# Altium PCB V2.PcbDoc
Units mm, origin at the board's own origin, x right, y up, seen from the top; angles counter-clockwise.
Board outline 99.95 x 100.08 mm, 2 copper layers (Top Layer, Bottom Layer); 77 components, 58 nets, 333 pads, 20 vias.
Unrouted connection lines stored in the file: 131.
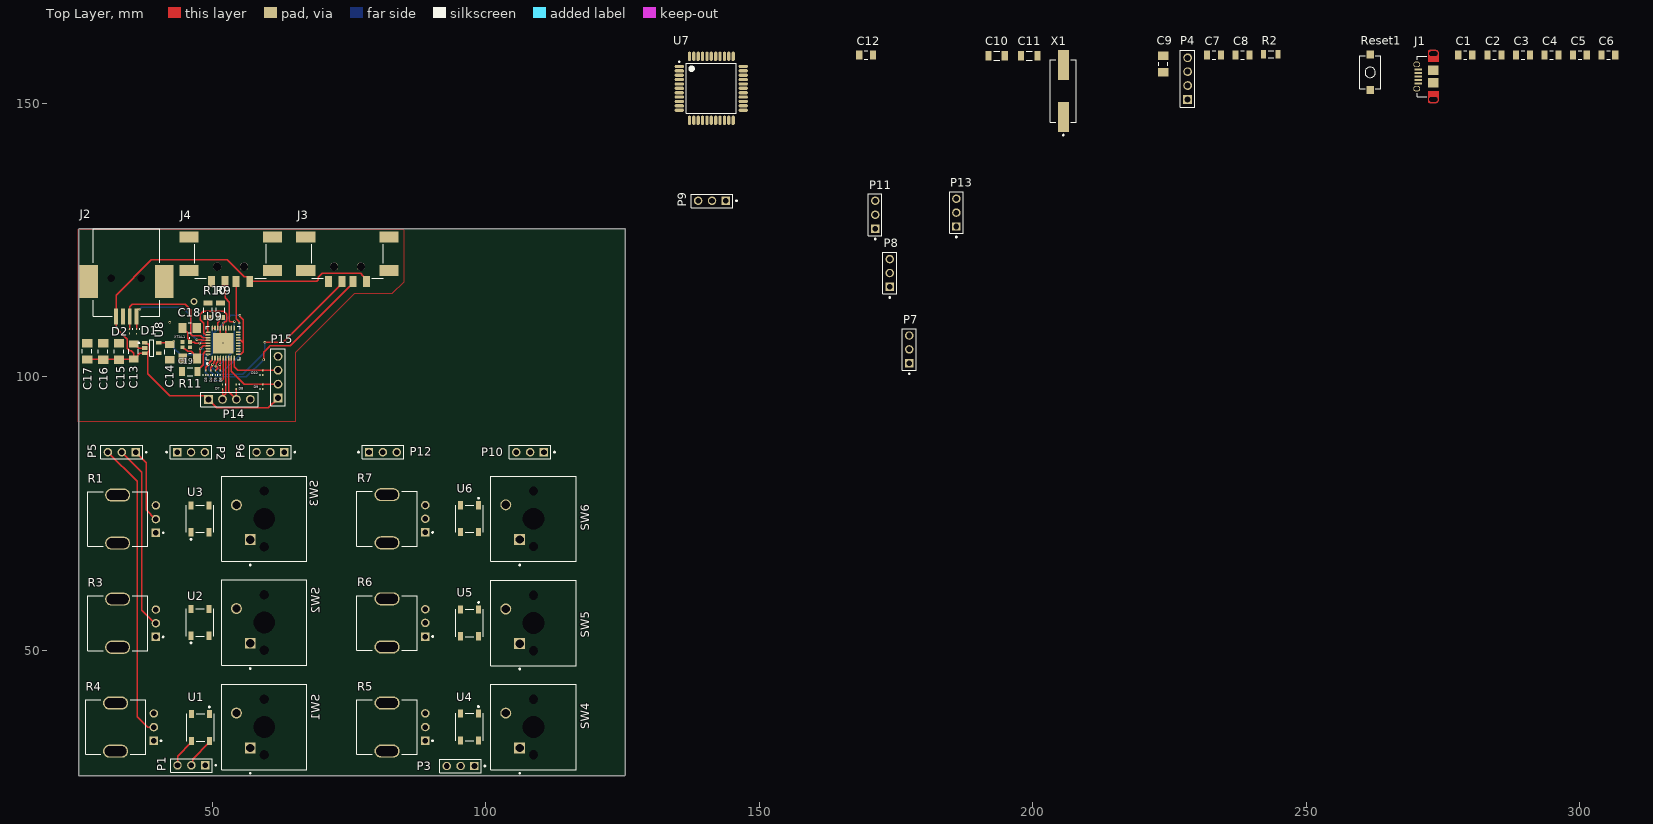
[diagram p0: Top Layer view]
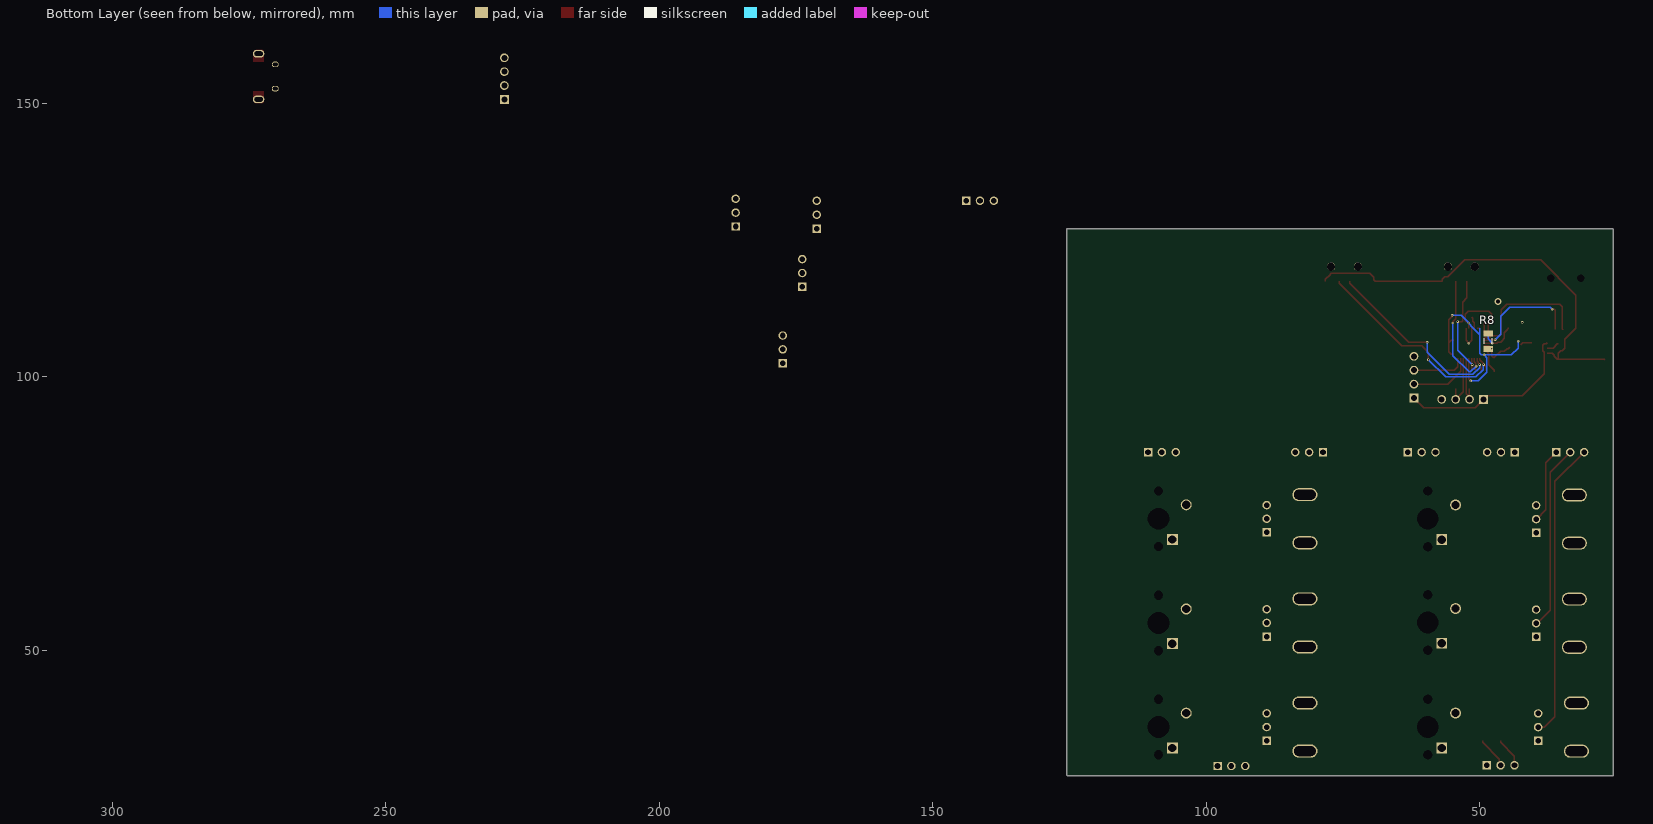
[diagram p1: Bottom Layer view, seen from below]

## Layer stack, top to bottom
Top Solder: solder mask 0.0102, Solder Resist, Dk 3.5
Top Layer: signal copper 0.0356
Dielectric 1: dielectric 0.32, FR-4, Dk 4.8
Bottom Layer: signal copper 0.0356
Bottom Solder: solder mask 0.0102, Solder Resist, Dk 3.5

## Board outline
25.527,27.051 25.527,127 25.654,127.127 125.476,127.127 125.476,27.178 125.349,27.051

## Design rules (kind name [scope] priority, off if disabled: settings)
Clearance [All] p1: gap=0.254 ignorepadtopadclearanceinfootprint=TRUE except(0: Arc-Hole Track-Hole SMDPad-Hole THPad-Hole Via-Hole Fill-Hole Poly-Hole Region-Hole Text-Hole; 0.2: Arc-Arc Arc-Track Arc-SMDPad Track-Track Track-SMDPad SMDPad-SMDPad)
PolygonConnect [All] p1: connectstyle=Relief reliefconductorwidth=0.254 reliefentries=4 polygonreliefangle="90 Angle" airgapwidth=0.254
RoutingVias [All] p1: holewidth=0.2 width=0.45 viastyle="Through Hole" minholewidth=0.2 minwidth=0.45 maxholewidth=0.2 maxwidth=0.45
RoutingVias RoutingVias_1 [All] p2: holewidth=0.711 width=1.27 viastyle="Through Hole" minholewidth=0.2 minwidth=0.45 maxholewidth=0.711 maxwidth=1.27
SolderMaskExpansion [All] p1: expansion=0.102 istentingtop=FALSE
Width [All] p1: maxlimit=0.254 minlimit=0.254 preferedwidth=0.254
30 further rules are at their usual default settings.

## Classes and differential pairs
component class "usb HUB": C13 C14 C15 C16 C17 C18 C19 D1 D2 D3 D4 D5 D6 D7 D8 D9 D10 J2 J3 J4 P14 P15 R8 R9 R10 R11 U8 U9 XTAL1
component class Deej: C1 C2 C3 C4 C5 C6 C7 C8 C9 C10 C11 C12 J1 P4 P5 P6 P7 P8 P9 P10 P11 P12 P13 P14 P15 R1 R2 R3 R4 R5 R6 R7 Reset1 SW1 SW2 SW3 SW4 SW5 SW6 U1 U2 U3 U4 U5 U6 U7 X1

## Components (designator, comment, footprint, x,y, rotation, side; value= is the part's Value field where it differs from the comment)
C1 "GRM31C5C1E104JA01L" CAPC3216X180X55LL20T25 279.141,158.877 r0 top
C2 "GRM31C5C1E104JA01L" CAPC3216X180X55LL20T25 284.475,158.877 r0 top
C3 "GRM31C5C1E104JA01L" CAPC3216X180X55LL20T25 289.682,158.877 r0 top
C4 "GRM31C5C1E104JA01L" CAPC3216X180X55LL20T25 294.889,158.877 r0 top
C5 "GRM31C5C1E104JA01L" CAPC3216X180X55LL20T25 300.096,158.877 r0 top
C6 "GRM31C5C1E104JA01L" CAPC3216X180X55LL20T25 305.303,158.877 r0 top
C7 "GRM31C5C1E104JA01L" CAPC3216X180X55LL20T25 233.167,158.877 r0 top
C8 "GRM31C5C1E104JA01L" CAPC3216X180X55LL20T25 238.374,158.877 r0 top
C9 "C1206C105K3RACTU" CAPC3216X180X50ML20T25 223.896,157.226 r90 top
C10 "CAP 22pF 50V 1206(3216)" CAPC1206(3216)100_N 193.416,158.75 r0 top value=22nF
C11 "CAP 22 pF 50V 1206(3216)" CAPC1206(3216)100_N 199.385,158.75 r0 top value=22nF
C12 "GRM31C5C1E104JA01L" CAPC3216X180X55LL20T25 169.54,158.877 r0 top
C13 "CL31B105MAHNNNE" FP-CL31-IPC_B 35.56,104.648 r90 top
C14 "CL31B105MAHNNNE" FP-CL31-IPC_B 42.164,104.521 r270 top
C15 "12061Z475KAT2A" CAPC3216X190X50ML20T25 32.893,104.648 r90 top
C16 "12061Z475KAT2A" CAPC3216X190X50ML20T25 29.972,104.648 r90 top
C17 "12061Z475KAT2A" CAPC3216X190X50ML20T25 27.051,104.672 r90 top
C18 "GRM31A7U2J180JW31D" FP-GRM31A-0_2-e0_3_0_95-IPC_B 45.816,108.966 r0 top
C19 "GRM31A7U2J180JW31D" FP-GRM31A-0_2-e0_3_0_95-IPC_B 45.847,103.378 r180 top
D1 "ESD9B3.3ST5G" ONSC-SOD-923-2-514AB-01_V 36.098,108.313 r270 top
D2 "ESD9B3.3ST5G" ONSC-SOD-923-2-514AB-01_V 34.798,108.331 r270 top
D3 "ESD9B3.3ST5G" ONSC-SOD-923-2-514AB-01_V 48.768,100.75 r90 top
D4 "ESD9B3.3ST5G" ONSC-SOD-923-2-514AB-01_V 49.657,100.75 r90 top
D5 "ESD9B3.3ST5G" ONSC-SOD-923-2-514AB-01_V 50.546,100.75 r90 top
D6 "ESD9B3.3ST5G" ONSC-SOD-923-2-514AB-01_V 51.435,100.75 r90 top
D7 "ESD9B3.3ST5G" ONSC-SOD-923-2-514AB-01_V 51.816,98.21 r270 top
D8 "ESD9B3.3ST5G" ONSC-SOD-923-2-514AB-01_V 54.356,98.21 r270 top
D9 "ESD9B3.3ST5G" ONSC-SOD-923-2-514AB-01_V 59.182,98.171 r90 top
D10 "ESD9B3.3ST5G" ONSC-SOD-923-2-514AB-01_V 59.182,100.75 r90 top
J1 "629105150921" 629105150921 273.299,154.94 r90 top
J2 "1734346-1" TECO-1734346-1_V 34.228,111.055 r90 top locked
J3 "629104190121" 629104190121 74.676,123.063 r180 top locked
J4 "629104190121" 629104190121 53.303,123.063 r180 top locked
P1 "22-28-4033" MOLX-22-28-4033_V 46.126,28.956 r180 top
P2 "22-28-4033" MOLX-22-28-4033_V 46.058,86.233 r0 top
P3 "22-28-4033" MOLX-22-28-4033_V 95.363,28.829 r180 top
P4 "61300411121" 61300411121 228.341,154.559 r90 top
P5 "22-28-4033" MOLX-22-28-4033_V 33.401,86.233 r180 top
P6 "22-28-4033" MOLX-22-28-4033_V 60.579,86.233 r180 top
P7 "22-28-4033" MOLX-22-28-4033_V 177.419,105.029 r90 top
P8 "22-28-4033" MOLX-22-28-4033_V 173.863,118.999 r90 top
P9 "22-28-4033" MOLX-22-28-4033_V 141.351,132.207 r180 top
P10 "22-28-4033" MOLX-22-28-4033_V 108.077,86.233 r180 top
P11 "22-28-4033" MOLX-22-28-4033_V 171.196,129.667 r90 top
P12 "22-28-4033" MOLX-22-28-4033_V 81.153,86.233 r0 top
P13 "22-28-4033" MOLX-22-28-4033_V 186.055,130.048 r90 top
P14 "61300411121" 61300411121 53.086,95.885 r0 top
P15 "61300411121" 61300411121 61.976,99.949 r90 top
R1 "PTV09A-4020U-B103" FP-PTV09A-4-MFG 32.639,73.991 r90 top value=10kΩ
R2 "ERJ-P08J103V" RESC3216X70X50LL05T20 243.581,159.004 r0 top
R3 "PTV09A-4020U-B103" FP-PTV09A-4-MFG 32.639,54.951 r90 top value=10kΩ
R4 "PTV09A-4020U-B103" FP-PTV09A-4-MFG 32.258,35.941 r90 top value=10kΩ
R5 "PTV09A-4020U-B103" FP-PTV09A-4-MFG 81.915,35.96 r90 top value=10kΩ
R6 "PTV09A-4020U-B103" FP-PTV09A-4-MFG 81.915,55.01 r90 top value=10kΩ
R7 "PTV09A-4020U-B103" FP-PTV09A-4-MFG 81.915,74.06 r90 top value=10kΩ
R8 "ERJ-8ENF1004V" RESC3216X70X50NL05T20 48.387,106.553 r270 bottom
R9 "CRCW120656K0FKEA" FP-CRCW1206-e3-IPC_C 51.435,112.212 r270 top
R10 "CRCW120656K0FKEA" FP-CRCW1206-e3-IPC_C 49.149,112.212 r270 top
R11 "ERJ-8GEYJ123V" RESC3216X70X50NL05T20 45.847,100.965 r180 top
Reset1 "434121025816" 434121025816 261.742,155.702 r90 top
SW1 "MX1A-11NW" CHRY-MX1A-11NW_V 59.436,35.96 r90 top
SW2 "MX1A-11NW" CHRY-MX1A-11NW_V 59.436,55.088 r90 top
SW3 "MX1A-11NW" CHRY-MX1A-11NW_V 59.436,74.041 r90 top
SW4 "MX1A-11NW" CHRY-MX1A-11NW_V 108.712,35.96 r90 top
SW5 "MX1A-11NW" CHRY-MX1A-11NW_V 108.712,55.01 r90 top
SW6 "MX1A-11NW" CHRY-MX1A-11NW_V 108.712,74.06 r90 top
U1 "WS2812B" ADAI-WS2812B_V 47.776,35.881 r270 top
U2 "WS2812B" ADAI-WS2812B_V 47.708,55.088 r90 top
U3 "WS2812B" ADAI-WS2812B_V 47.708,74.041 r90 top
U4 "WS2812B" ADAI-WS2812B_V 96.984,35.96 r270 top
U5 "WS2812B" ADAI-WS2812B_V 97.013,55.01 r270 top
U6 "WS2812B" ADAI-WS2812B_V 97.013,74.06 r270 top
U7 "ATMEGA32U4-AU" ATML-44ML_M 141.219,152.781 r0 top
U8 "MIC5504-3.3YM5-TR" FP-SOT23-5LD-PL-1-MFG 38.862,105.283 r0 top
U9 "USB2514B-AEZC" MCHP-QFN-36_V 51.943,106.172 r90 top
X1 "9C-3.6864MBBK-T" TXC-9C-2_V 205.608,152.273 r90 top
XTAL1 "XRCGB24M000F0L00R0" XTAL_XRCGB24M000F0L00R0 45.172,105.91 r270 top

## Footprints (in the part's own frame and the unit in brackets; to place one, negate y for a bottom-side part, rotate by r counter-clockwise, add the part's x,y. Pads: shape width x height; smd on the part's side, far side on the other; paste and mask are expansions set on the pad)
61300411121 [mm] "Pin Header, pitch 2.54 mm, THT, Vertical, single row, 4p"
  rect 1.6x1.6 hole 1.1: 1(-3.81,0)
  round 1.6 hole 1.1: 2(-1.27,0) 3(1.27,0) 4(3.81,0)
  silkscreen extent -5.23,-1.35 5.23,1.35, body extent -5.08,-1.27 5.08,1.27, height 8.57
434121025816 [mm] "6.0*3.8mm vertical type, SMD, height 2.5mm, black actuator, 160gf, T&R"
  rect 1.5x1.4 smd: 1(-3.25,0) 2(3.25,0)
  silkscreen extent -3,-1.9 3,1.9, body extent -3.65,-1.95 3.65,1.95, height 2.5
629104190121 [mm] "USB 2.0 Type A Horizontal SMT Short Type"
  rect 1.25x2 smd: 1(-3.5,5.6) 2(-1,5.6) 3(1,5.6) 4(3.5,5.6)
  round 1.5 hole 1.5 unplated: MH1(-2.45,2.9) MH2(2.45,2.9)
  rect 3.5x2 smd: Shell(-7.625,-2.5) Shell(-7.625,3.6) Shell(7.625,-2.5) Shell(7.625,3.6)
  silkscreen extent -6.55,-1.2 6.55,5, body extent -8.25,-5 8.25,6.11, height 6.35
629105150921 [mm] "Micro USB 2.0 Type AB Horizontal"
  rect 0.4x1.35 smd: 1(-1.3,2.805) 2(-0.65,2.805) 3(0,2.805) 4(0.65,2.805) 5(1.3,2.805)
  round 0 / inner oval 1.4x2.1 / far side oval 1.4x2.1 hole 0.825 slot 1.5 at 90 deg mask+0.102: Shell(-4.175,0)
  oval 1.05x1.25 hole 0.65 slot 0.85 at 90 deg: Shell(-2.225,3.055) Shell(2.225,3.055)
  rect 1.8x1.9 smd: Shell(-1.15,0) Shell(1.15,0)
  round 0 / inner round 0 / far side oval 1.4x2.1 hole 0.825 slot 1.5 at 90 deg mask+0.102: Shell(4.175,0)
  Top Layer region: 4.353,-0.95 4.544,-0.912 4.706,-0.804 4.814,-0.641 4.852,-0.45 4.852,-0.45 4.852,0.65 4.83,0.765 4.765,0.862 4.667,0.927 4.553,0.95 4.553,0.95 2.668,0.95 2.668,-0.95
  Top Layer region: -4.353,-0.95 -4.544,-0.912 -4.706,-0.804 -4.814,-0.641 -4.852,-0.45 -4.852,-0.45 -4.852,0.65 -4.83,0.765 -4.765,0.862 -4.667,0.927 -4.553,0.95 -4.553,0.95 -2.668,0.95 -2.668,-0.95
  silkscreen extent -3.7,1.25 3.7,2.97, body extent -4.3,-2.64 4.3,3.23, height 2.76
ADAI-WS2812B_V [mm] "SMD, 4-Leads, Body 5x5mm, Pitch 3.3mm"
  rect 1.5x0.9 smd: 1(-2.45,1.65) 2(-2.45,-1.65) 3(2.45,-1.65) 4(2.45,1.65)
  silkscreen extent -3.87,-2.5 2.5,2.5, body extent -2.7,-2.5 2.7,2.5, height 1.69
ATML-44ML_M [mm] "TQFP, 44-Leads, Body 10x10mm, Pitch 0.8mm, IPC Low Density"
  oval 1.7x0.6 smd: 1(-5.85,4) 2(-5.85,3.2) 3(-5.85,2.4) 4(-5.85,1.6) 5(-5.85,0.8) 6(-5.85,0) 7(-5.85,-0.8) 8(-5.85,-1.6) 9(-5.85,-2.4) 10(-5.85,-3.2) 11(-5.85,-4) 23(5.85,-4) 24(5.85,-3.2) 25(5.85,-2.4) 26(5.85,-1.6) 27(5.85,-0.8) 28(5.85,0) 29(5.85,0.8) 30(5.85,1.6) 31(5.85,2.4) 32(5.85,3.2) 33(5.85,4)
  oval 0.6x1.7 smd: 12(-4,-5.85) 13(-3.2,-5.85) 14(-2.4,-5.85) 15(-1.6,-5.85) 16(-0.8,-5.85) 17(0,-5.85) 18(0.8,-5.85) 19(1.6,-5.85) 20(2.4,-5.85) 21(3.2,-5.85) 22(4,-5.85) 34(4,5.85) 35(3.2,5.85) 36(2.4,5.85) 37(1.6,5.85) 38(0.8,5.85) 39(0,5.85) 40(-0.8,5.85) 41(-1.6,5.85) 42(-2.4,5.85) 43(-3.2,5.85) 44(-4,5.85)
  silkscreen extent -5.97,-4.6 4.6,4.97, body extent -6,-6 6,6, height 1.2
CAPC1206(3216)100_N [mm] "Chip Capacitor, Body 3.2x1.6mm, Height 1mm, IPC Medium Density"
  rect 1.15x1.8 smd: 1(-1.5,0) 2(1.5,0)
  silkscreen extent -0.55,-0.8 0.55,0.8, body extent -1.7,-0.9 1.7,0.9, height 1
CAPC3216X180X50ML20T25 [mm] "Chip Capacitor, 2-Leads, Body 3.40x1.80mm, IPC Low Density"
  rect 1.5x1.9 smd: 1(-1.5,0) 2(1.5,0)
  silkscreen extent -0.35,-0.85 0.35,0.85, body extent -1.7,-0.9 1.7,0.9, height 1.8
CAPC3216X180X55LL20T25 [mm] "Chip Capacitor, 2-Leads, Body 3.4x1.8mm, IPC High Density"
  rect 1.15x1.7 smd: 1(-1.275,0) 2(1.275,0)
  silkscreen extent -0.3,-0.75 0.3,0.75, body extent -1.7,-0.9 1.7,0.9, height 1.8
CAPC3216X190X50ML20T25 [mm] "Chip Capacitor, 2-Leads, Body 3.20x1.60mm, IPC Low Density"
  rect 1.5x1.9 smd: 1(-1.5,0) 2(1.5,0)
  silkscreen extent -0.35,-0.85 0.35,0.85, body extent -1.7,-0.9 1.7,0.9, height 1.9
CHRY-MX1A-11NW_V [mm] "THD, 2-Leads, Body 15.6x15.6mm"
  rect 2x2 hole 1.499 paste+0: 1(-3.81,2.54)
  round 2 hole 1.499 paste+0: 2(2.54,5.08)
  round 0 hole 3.988 unplated paste+0: MH1(0,0)
  round 0 hole 1.702 unplated paste+0: MH2(-5.08,0) MH3(5.08,0)
  silkscreen extent -8.57,-7.8 7.8,7.8, body extent -7.8,-7.8 7.8,7.8, height 15.2
FP-CL31-IPC_B [mm]
  rect 1.305x1.758 smd paste+0 mask+0: 1(-1.376,0) 2(1.376,0)
  silkscreen extent -0.42,-0.88 0.42,0.88, body extent -2.28,-1.13 2.28,1.13, height 0.25
FP-CRCW1206-e3-IPC_C [mm]
  rect 0.956x1.658 smd paste+0 mask+0: 1(-1.326,0) 2(1.326,0)
  silkscreen extent -0.47,-0.8 0.47,0.8, body extent -1.9,-0.97 1.9,0.97, height 0.25
FP-GRM31A-0_2-e0_3_0_95-IPC_B [mm]
  rect 1.504x1.806 smd paste+0 mask+0: 1(-1.301,0) 2(1.301,0)
  silkscreen extent -0.25,-0.9 0.25,0.9, body extent -2.3,-1.15 2.3,1.15, height 0.25
FP-PTV09A-4-MFG [mm]
  rect 1.55x1.55 hole 1 paste-1000 mask+0: 1(-2.5,-7)
  round 1.55 hole 1 paste-1000 mask+0: 2(0,-7) 3(2.5,-7)
  rrect100% 2.4x4.6 hole 4 slot 1.8 at 0 deg paste-1000 mask+0: 4(-4.4,0) 5(4.4,0)
  silkscreen extent -5,-8.45 5,5.5, body extent -5.8,-7.88 5.8,5.6, height 0.25
FP-SOT23-5LD-PL-1-MFG [mm]
  rect 1x0.66 smd paste+0 mask+0: 1(-1.3,0.95) 2(-1.3,0) 3(-1.3,-0.95) 4(1.3,-0.95) 5(1.3,0.95)
  silkscreen extent -2.47,-1.5 0.35,1.5, body extent -1.9,-1.6 1.9,1.6, height 0.25
MCHP-QFN-36_V [mm] "QFN, 36-Leads, Body 6.00x6.00mm, Pitch 0.50mm, Thermal Pad 3.70x3.70mm"
  oval 0.9x0.28 smd: 1(-2.75,2) 2(-2.75,1.5) 3(-2.75,1) 4(-2.75,0.5) 5(-2.75,0) 6(-2.75,-0.5) 7(-2.75,-1) 8(-2.75,-1.5) 9(-2.75,-2) 19(2.75,-2) 20(2.75,-1.5) 21(2.75,-1) 22(2.75,-0.5) 23(2.75,0) 24(2.75,0.5) 25(2.75,1) 26(2.75,1.5) 27(2.75,2)
  oval 0.28x0.9 smd: 10(-2,-2.75) 11(-1.5,-2.75) 12(-1,-2.75) 13(-0.5,-2.75) 14(0,-2.75) 15(0.5,-2.75) 16(1,-2.75) 17(1.5,-2.75) 18(2,-2.75) 28(2,2.75) 29(1.5,2.75) 30(1,2.75) 31(0.5,2.75) 32(0,2.75) 33(-0.5,2.75) 34(-1,2.75) 35(-1.5,2.75) 36(-2,2.75)
  rect 3.7x3.7 smd: 37(0,0)
  silkscreen extent -3.85,-3.08 3.08,3.08, body extent -2.95,-3 3.05,3, height 1
MOLX-22-28-4033_V [mm] "THD, 3-Leads, Body 7.62x2.49mm, Pitch 2.54mm"
  rect 1.55x1.55 hole 1.02: 1(-2.54,0)
  round 1.55 hole 1.02: 2(0,0) 3(2.54,0)
  silkscreen extent -4.59,-1.24 3.81,1.24, body extent -3.81,-1.24 3.81,1.24, height 8.38
ONSC-SOD-923-2-514AB-01_V [mm] "SOD, 2-Leads, Body 0.8x0.6mm"
  rect 0.36x0.25 smd: 1(-0.42,0) 2(0.42,0)
  silkscreen extent -0.47,0.48 -0.37,0.58, body extent -0.4,-0.3 0.4,0.3, height 0.4
RESC3216X70X50LL05T20 [mm] "Chip Resistor, 2-Leads, Body 3.20x1.60mm, IPC High Density"
  rect 0.9x1.55 smd: 1(-1.325,0) 2(1.325,0)
  silkscreen extent -0.5,-0.67 0.5,0.67, body extent -1.63,-0.82 1.62,0.82, height 0.7
RESC3216X70X50NL05T20 [mm] "Chip Resistor, 2-Leads, Body 3.20x1.60mm, IPC Medium Density"
  rect 1.1x1.65 smd: 1(-1.425,0) 2(1.425,0)
  silkscreen extent -0.5,-0.72 0.5,0.72, body extent -1.63,-0.82 1.62,0.82, height 0.7
TECO-1734346-1_V [mm] "SMD, 4-Leads, Body 12.04x16mm, Height 10.87 mm"
  rect 3x0.7 smd: 1(0,1.87) 2(0,-0.62) 3(0,-1.87) 4(0,0.62)
  rect 6.04x3.4 smd: 5(6.42,6.92) 6(6.42,-6.92)
  round 0.6 hole 1.4 unplated: MH(7,-2.75) MH(7,2.75)
  silkscreen extent -2.17,-6.07 16,6.07, body extent -1.1,-8.25 16,8.25, height 11.3
TXC-9C-2_V [mm] "SMD, 2-Leads, Body 11.4 x 4.8 mm, Height 4.1 mm"
  rect 5.5x2 smd: 1(-4.75,0) 2(4.75,0)
  silkscreen extent -8.17,-2.4 5.7,2.4, body extent -5.7,-2.4 5.7,2.4, height 4.1
XTAL_XRCGB24M000F0L00R0 [mm]
  rect 0.7x0.75 smd: 1(-0.5,0.675) 2(-0.5,-0.675) 3(0.5,-0.675) 4(0.5,0.675)
  silkscreen extent -1.25,0.55 -1.15,0.65

## Part data
C1 C2 C3 C4 C5 C6 C7 C8 C12: library part CMP-2000-06343-1, "Chip Capacitor, 100 nF, +/- 5%, 25 V, -55 to 125 degC, 1206 (3216 Metric), RoHS, Tape and Reel", Capacitance=0.1µF, Capacitance Tolerance=±5%, Capacitor Case Style=1206[3216Metric], Capacitor Terminals=SMD, Dielectric Characteristic=C0G/NP0, Insulation Resistance=10000Mohm, Manufacturer=Murata, Operating Temperature Max=125°C, Operating Temperature Min=-55°C, Operating Temperature Range=-55°Cto+125°C, Package / Case=1206, Package Description="2-Pin Surface Mount Device, Body 3.2 x 1.6 mm", Temperature Coefficient=0ppm/°C±30ppm/°C, Tolerance +=5%, Voltage Rating=25V, Datasheet URL=https://datasheet.ciiva.com/3777/11308grm31c5c1e104ja0123-3777177.pdf, Datasheet Version=09/2014, External Length / Height=1mm, External Width=0.5mm, Lead Spacing=–, Manufacturer URL=http://www.murata.com/, Mounting Technology=SurfaceMount, MSL=–, No. of Pins=2, Package Reference=1206, Reel Quantity=2000, SVHC=NoSVHC(19-Dec-2012), Terminal Type=SurfaceMount(SMD,SMT), Tolerance -=5%, Voltage Rating V DC=25V
C9: library part CMP-2000-04991-1, "Chip Capacitor, 1 uF, +/- 10%, 25 V, -55 to 125 degC, 1206 (3216 Metric), RoHS, Tape and Reel", Capacitance=1uF, Capacitance - nF=1000nF, Case Code - in=1206, Case Code - mm=3216, Case Height=1.6mm, Case Length=3.2mm, Dielectric=X7R, Manufacturer=Kemet, Maximum Operating Temperature=+125C, Minimum Operating Temperature=-55C, Operating Temperature Range=-55Cto+125C, Package / Case=1206(3216metric), Package Description="2-Pin Surface Mount Device, Body 3.2 x 1.6 mm", Temperature Coefficient / Code=+/-15%, Tolerance=10%, Voltage Rating=25V, Brand=Kemet, Case Width=1.6mm, Class=Class1, Datasheet URL=https://ciiva.com/datasheet-click-18194173?src=ciiva&sig=6daff8c4, Datasheet Version=Jul-14, Dimensions=1.6mmWx3.2mmLx1.6mmH, Factory Pack Quantity=2000, Manufacturer URL=http://www.kemet.com/, Package Reference=1206, Packaging=Reel, Product=GeneralTypeMLCCs, Product Category=MultilayerCeramicCapacitorsMLCC-SMD/SMT, RoHS=Details, Series=C1206C, Termination Style=SMD/SMT, Type=SMDMLCCX7R6.3-250VDCCommericalGrade, Voltage Rating DC=25V
C10 C11: library part CMP-1037-03764-1, "CAP 22nF 50V ±5% 1206 (3216 Metric) Thickness 1mm SMD", Case-EIA=1206, Case-Metric=3216, Rated Voltage="50 V", Tolerance=Â±5%, Max Thickness="1 mm", Technology=SMT
C13 C14: library part CMP-13271-000122-1, "Cap Ceramic 1uF 25V X7R ±20% SMD 1206 +125°C Embossed T/R", Capacitance=1uF, Case Code (Imperial)=1206, Case Code (Metric)=3216, Dielectric=X7R, Max Operating Temperature=125°C, Min Operating Temperature=-55°C, Package Quantity=1, Tolerance=20%, Voltage Rating=25V, Case/Package=1206, Contact Plating=Tin, Depth=1.6mm, Height=1.6mm, Lead Free="Lead Free", Length=3.2mm, Mount="Surface Mount", Packaging="Tape and Reel", Radiation Hardening=No, Thickness=0.071inch, Voltage Rating (DC)=25V, Width=0.063inch
C15 C16 C17: library part CMP-2000-05019-1, "Chip Capacitor, 4.7 uF, +/- 10%, 100 V, -55 to 125 degC, 1206 (3216 Metric), RoHS, Tape and Reel", Capacitance=4.7µF, Capacitance Tolerance=±10%, Ceramic Capacitor Case=1206[3216Metric], Dielectric Characteristic=X7S, Manufacturer=AVX, Operating Temperature Max=125degC, Operating Temperature Min=-55degC, Voltage Rating=100V, Datasheet URL=https://datasheet.ciiva.com/22677/1789384-22677168.pdf, Datasheet Version=Oct-13, Manufacturer URL=http://www.avx.com/, MSL=MSL1-Unlimited, Packaging=CutTape, SVHC=NoSVHC(17-Dec-2015)
C18 C19: library part CMP-06035-014678-1, "Chip Multilayer Ceramic Capacitors for General Purpose, 1206, 18pF, U2J, -750ppm/°C, 5%, 630V", Capacitance=18pF, Case Code (Imperial)=1206, Case Code (Metric)=3216, Dielectric=U2J, Max Operating Temperature=125°C, Min Operating Temperature=-55°C, Package Quantity=4000, Tolerance=5%, Voltage Rating=630V, Case/Package=1206, Depth=1.6mm, Height=1mm, Lead Free="Lead Free", Length=3.2mm, Mount="Surface Mount", Packaging="Tape and Reel", Radiation Hardening=No, REACH SVHC="No SVHC", Termination=SMD/SMT, Thickness=0.039inch, Voltage Rating (DC)=630V, Width=0.063inch
D1 D2 D3 D4 D5 D6 D7 D8 D9 D10: library part CMP-1063-00120-1, "Transient Voltage Suppressor, Micro-Packaged Diode for ESD Protection, 2-Pin SOD-923, Pb-Free, Tape and Reel", Manufacturer="On Semiconductor", ComponentLink1Description="Manufacturer URL", ComponentLink1URL=http://www.onsemi.com/, ComponentLink2Description=Datasheet, ComponentLink2URL=http://www.onsemi.cn/pub_link/Collateral/ESD9B-D.PDF, ComponentLink3Description="Package Specification", ComponentLink3URL=http://www.onsemi.com/pub_link/Collateral/514AB.PDF, DatasheetVersion="Rev. 2", Direction=Bidirectional, IR Max (uA)=1, Mounting Technology="Surface Mount", Number of Lines=1, PackageDescription="2-Pin SOD, Body 0.8 x 0.6 mm", PackageReference=SOD-923-2-514AB-01, PackageVersion="Rev. C, 03/2011", Packing="Tape and Reel", PartNumber=ESD9B3.3ST5G, RoHS=Pb-Free, V(BR) Min (V)=5, VRWM Max (V)=3.3
J1: library part CMP-1502-03249-1, "Micro USB 2.0 Type AB Receptacle WR-COM, Horizontal, SMT", Contact Resistance=30mOhm, Manufacturer="Wurth Elektronik", Operating Temperature=-40to85degC, Rated Current=1.8A, Working Voltage=30VAC, Connector Type=MicroUSB2.0TypeAB, Datasheet URL=https://katalog.we-online.de/em/datasheet/629105150921.pdf, Gender=Receptacle, Manufacturer URL=http://www.we-online.de, Mounting Technology=SMT, Orientation=Horizontal, Package Reference=629105150921, Packaging=TapeandReel, Part Number=629105150921, Publisher=WurthElektronik
J2: library part CMP-2000-07498-1, "USB-B Receptacle Connector, Height 10.87 mm, 0 to 50 degC, RoHS, Tray", Case\/Package=SMD/SMT, Flammability Rating=UL94V-0, Housing Colour=Black, Insulation Resistance=1GR, Manufacturer="TE Connectivity", Package Description="4-Pin Pin Surface Mount Device, Body 12.04 x 16 mm, Height 10.87 mm", Package Quantity=100, Connector Type=Receptacle, Contact Material=Bronze, Contact Plating=Gold, Datasheet URL=http://www.te.com/commerce/DocumentDelivery/DDEController?Action=srchrtrv&DocNm=1734346&DocType=Customer+Drawing&DocLang=English, Datasheet Version="Rev. C, 06/2011", Depth=16mm, ELV=Compliant, Gender=Receptacle, Housing Material=Nylon, Insulation Material=Thermoplastic, Length=16.5mm, Manufacturer URL=http://www.te.com/, Material=Bronze, Mount=Horizontal, Mounting Technology=SurfaceMount, Number of Contacts=4, Number of Ports=1, Number of Positions=4, Number of Terminals=4, Orientation=RightAngle, Package Reference=1734346-1, Packaging=Tray, Plating=Nickel, REACH SVHC=Unknown, RoHSCompliant=true, Termination=SMD/SMT
J3 J4: library part CMP-1502-03232-1, "USB 2.0 Type A Receptacle WR-COM, Horizontal, SMT, Short Type with Pads and Pegs", Contact Resistance=30mOhm, Manufacturer="Wurth Elektronik", Operating Temperature=-40to85degC, Rated Current=1.5A, Working Voltage=30VAC, Connector Type=USB2.0TypeA, Datasheet URL=https://katalog.we-online.de/em/datasheet/629104190121.pdf, Gender=Receptacle, Manufacturer URL=http://www.we-online.de, Mounting Technology=SMT, Orientation=Horizontal, Package Reference=629104190121, Packaging=TapeandReel, Part Number=629104190121, Publisher=WurthElektronik
P1 P2 P3 P5 P6 P7 P8 P9 P10 P11 P12 P13: library part CMP-1676-00001-5, "Male Header, Pitch 2.54 mm, 1 x 3 Position, Height 8.38 mm, Tail Length 3.18 mm, RoHS, Bulk", Colour=Black, Current Rating="4 A", Manufacturer=Molex, Max Operating Temperature="75 degC", Min Operating Temperature="0 degC", Package Quantity=1, Voltage Rating="250 V", ComponentLink1Description="Manufacturer URL", ComponentLink1URL=http://www.molex.com/, ComponentLink2Description=Datasheet, ComponentLink2URL=http://www.molex.com/pdm_docs/sd/022284033_sd.pdf, Contact Finish=Gold, Contact Material=Brass, Contact Plating=Gold, DatasheetVersion="Rev. G, 01/2012", Height="8.38 mm", Lead Pitch="0.1 inch", Length="7.62 mm", Mount="Through Hole", Mounting Technology="Through Hole", PackageDescription="Male Header, Pitch 2.54 mm, 1 x 3 Position, Height 8.38 mm, Tail Length 3.18 mm", PackageReference=22-28-4033, Packaging=Bulk, Pins=3, REACH SVHC=Unknown, RoHSCompliant=true, Rows=1
P4 P14 P15: library part CMP-1502-01064-1, "THT Vertical Pin Header WR-PHD, Pitch 2.54 mm, Single Row, 4 pins", Contact Resistance=20mOhm, Manufacturer="Wurth Elektronik", Operating Temperature=-40to105degC, Rated Current=3A, Withstanding Voltage=500VAC, Working Voltage=250VAC, Datasheet URL=https://katalog.we-online.de/em/datasheet/6130xx11121.pdf, Gender=Male, Manufacturer URL=http://www.we-online.de, Mounting Technology=THT, Orientation=Vertical, Package Reference=61300411121, Packaging=Bag, Part Number=61300411121, Pin Number=4, Pitch=2.54mm, Publisher=WurthElektronik, Row Number=Single
R1 R3 R4 R5 R6 R7: library part CMP-07234-000013-1, "POT 10K OHM 1/20W CARBON LINEAR", Manufacturer="Bourns Inc.", Package=PTV09A-4, Power Rating=0.05W, Resistance=10kΩ, Temperature="-10°C to +50°C", Temperature Range High=+50°C, Temperature Range Low=-10°C, Tolerance=20%, Voltage Rating=50V, Automotive=No, Category=Res, ComponentLink2Description=Datasheet, ComponentLink2URL=https://www.bourns.com/docs/product-datasheets/ptv09.pdf?sfvrsn=5e1089f1_12, Composition=Carbon, Device Class L1="Passive Components", Device Class L2=Resistors, Device Class L3="Variable Resistors and Potentiometers", Digikey Description="POT 10K OHM 1/20W CARBON LINEAR", Height=20.5mm, Lead Free=Yes, Manufacturer Part Number=PTV09A-4020U-B103, Mouser Description="Potentiometers 10K LINEAR 20%", Octopart=https://octopart.com/ptv09a-4020u-b103-bourns-1878033, RoHS=TRUE, Series=PTV09
R2: library part CMP-2003-00715-1, Manufacturer=Panasonic, Part Number=ERJ-P08J103V
R8: library part CMP-2003-00020-1, Manufacturer=Panasonic, Part Number=ERJ-8ENF1004V
R9 R10: library part CMP-2003-02282-2, "RES Thick Film, 56kΩ, 1%, 0.25W, 100ppm/°C, 1206", Case Code (Imperial)=1206, Case Code (Metric)=3216, Max Operating Temperature=155°C, Max Power Dissipation=250mW, Min Operating Temperature=-55°C, Package Quantity=10, Resistance=56kR, Temperature Coefficient=100ppm/°C, Tolerance=1%, Voltage Rating=200V, Case/Package=1206, Composition="Thick Film", Contact Plating=Tin, Depth=1.6mm, Features="Automotive AEC-Q200", Height=0.55mm, Lead Free="Lead Free", Length=3.2mm, Military Standard=Not, Number of Pins=2, Number of Terminations=2, Packaging="Tape and Reel", Power Rating=250mW, Radiation Hardening=No, Termination=SMD/SMT, Voltage Rating (DC)=200V, Weight=0.000353oz, Width=0.063inch
R11: library part CMP-2003-00554-1, Manufacturer=Panasonic, Part Number=ERJ-8GEYJ123V
Reset1: library part CMP-1459-00004-1, "WS-TASV SMD Tact Switch 6.0X3.8 mm", Manufacturer="Wuerth Elektronik", ComponentLink1Description="Manufacturer URL", ComponentLink1URL=http://www.we-online.com, ComponentLink2Description=Datasheet, ComponentLink2URL=http://katalog.we-online.de/em/datasheet/434121025816.pdf, NoPins=02, PackageReference=434121025816, PartNumber=434121025816
SW1 SW2 SW3 SW4 SW5 SW6: library part CMP-2000-06786-1, "Keylock Switch, 12 V, -10 to 70 degC, 2-Pin THD, RoHS, Bulk", Actuator Color=N/A, Illumination Color=N/R, Manufacturer=Cherry, Maximum AC Voltage Rating=12V, Maximum Contact Resistance=200mOhm, Maximum Current Rating=0.01A, Minimum Insulation Resistance=100MOhm, Operating Force=0.58N, Operating Temperature=-10to70C, Package Description="2-Pin Through Hole Device, Body 15.6 x 15.6 mm", Part No=MX1A11NW, Actuator Length=3.6mm, Actuator Material=N/A, Actuator Style=Button, Body Orientation=Straight, Contact Material=Silver/Gold, Contact Plating=N/A, COO=UK, Datasheet URL=https://cdn.sparkfun.com/datasheets/Components/Switches/MX%20Series.pdf, Datasheet Version=09/2000, Dielectric Strength=N/A, Dimension=15.6x15.6x15.2mm, ECCN=EAR99, Electrical Life=50000000Cycle, Family=MX, Housing Material=N/A, HTS=8536509065, Illumination Type=N/R, IP Rating=N/A, Manufacturer URL=http://cherryswitches.com/cn/, Maximum DC Voltage Rating=12V, Maximum Power Rating=N/A, Mechanical Life=N/A, Mounting=ThroughHole, Mounting Technology=ThroughHole, Number of Terminals=2, Operating Speed=N/A, Package Reference=MX1A-11NW, Packaging=N/A, Pole Throw Configuration=SPST, RoHS=Unknown, Row Spacing=6.35mm, Supplier=CherryElectrical, Switch Configuration=N.O., Terminal Pitch=2.54mm, Terminal Type=PCPins, Total Travel=4.06mm, Type=DesktopProfile
U1 U2 U3 U4 U5 U6: library part CMP-007-00035-1, "Intelligent Control LED Integrated Light Source, 3.5 to 5.3 V, -25 to 80 degC, 4-Pin SMD, RoHS, Bulk", Manufacturer="Adafruit Industries", Package Description="4-Pin Surface Mount Device, Body 5 x 5 mm, Pitch 3.3 mm", Case/Package=WS2812B, Datasheet URL=https://cdn-shop.adafruit.com/datasheets/WS2812B.pdf, Datasheet Version=May-13, Manufacturer URL=https://www.adafruit.com/, Mounting Technology=SM, Package Reference=WS2812B, RoHS Compliant=False
U7: library part CMP-020-00016-2, "8-bit Microcontroller with 32 Kbytes of ISP Flash and USB Controller, 2.7 to 5.5 V, -40 to 85 degC, 44-Pin QFP, Tray", Case/Package=TQFP, Frequency=16MHz, Manufacturer=Atmel, Max Operating Temperature=85°C, Max Supply Voltage=5.5V, Min Operating Temperature=-40°C, Min Supply Voltage=2.7V, Package Description="44-Pin Thin Profile Plastic Quad Flat Papckage, Body 10 x 10 mm, Pitch 0.8 mm", Package Quantity=800, Package Reference=44ML, Package Version="Rev. J, 02/2014", ADC Channels=12, Datasheet URL=http://www.atmel.com/images/atmel-7766-8-bit-avr-atmega16u4-32u4_summary.pdf, Datasheet Version="Rev. 7766IS, 07/2015", Density=32KB, Ethernet Channels=0, I/Os=26, Interface=USART, Manufacturer URL=http://www.atmel.com/, Max Clock Frequency=16MHz, Mounting Technology=SM, Package URL=http://www.atmel.com/images/atmel-7766-8-bit-avr-atmega16u4-32u4_summary.pdf, Packaging=Tray, Pins=44, PWM Channels=8, RAM Size=2.5KB, RoHS Compliant=True
U8: library part CMP-2000-07604-2, "IC REG LINEAR 3.3V 300MA SOT23-5", Case/Package=SOT-23-5, Dropout Voltage=380mV, Max Input Voltage=5.5V, Max Operating Temperature=125°C, Max Output Current=300mA, Min Input Voltage=2.5V, Min Operating Temperature=-40°C, Nominal Output Voltage=3.3V, Operating Supply Current=42uA, Power Supply Rejection Ratio (PSRR)=60dB, Quiescent Current=38uA, Accuracy=3%, Height=1.1mm, Length=2.9mm, Mount="Surface Mount", Number of Outputs=1, Number of Pins=5, Output Current=300mA, Output Type=Fixed, Output Voltage=3.3V, Packaging="Tape and Reel", REACH SVHC="No SVHC", Width=1.6mm
U9: library part CMP-2000-05217-1, "USB 2.0 High-Speed Hub Controller, 4 Ports, 3 to 3.6 V, 0 to 85 degC, 36-Pin QFN, RoHS, Tray", Current - Supply=70mA, Manufacturer=Microchip, Operating Temperature=-, Package / Case=36-VFQFNExposedPad, Standard Package=490, Supplier Device Package=36-QFN(6x6), Voltage - Supply=3V~3.6V, Category=IntegratedCircuits(ICs), Datasheet URL=http://ww1.microchip.com/downloads/en/DeviceDoc/00001692C.pdf, Datasheet Version="DS00001692C, 10/2015", Family=Interface-Controllers, Function=-, Interface=I²CEEPROM,SMBus(2-Wire,I²C), Manufacturer Part Number=USB2514B-AEZC, Manufacturer URL=http://www.microchip.com/, Other Names=638-1122, Packaging=Tray, Protocol=-, Series=-, Standards=-
X1: library part CMP-0724-00001-1, "9C Series Quartz Crystal, 3.6864 MHz, +/-50 ppm, 20 pF, -40 to 85 degC, 2-Pin 11.4 x 4.8 x 4.1 mm SMD, RoHS, Tape and Reel", Frequency="3.6864 MHz", Frequency Stability (over Temp.)="+/-50 ppm (-20 to 70 degC)", Frequency Tolerance (at 25 degC)="+/-50 ppm", Load Capacitance="20 pF", Manufacturer=TXC, Operating Temperature Range="-40 to 85 degC", ComponentLink1Description="Manufacturer URL", ComponentLink1URL=http://www.txccrystal.com/, ComponentLink2Description=Datasheet, ComponentLink2URL=http://www.txccrystal.com/images/pdf/9c.pdf, ComponentLink3Description="Package Specification", ComponentLink3URL=http://www.txccrystal.com/images/pdf/9c.pdf, DatasheetVersion=Jun-10, Mounting Technology="Surface Mount", PackageDescription="2-Pin SMD, Body 11.4 x 4.8 mm, Height 4.1 mm", PackageReference=9C-2, PackageVersion=Jun-10, Packing="Tape and Reel", PartNumber=9C-3.6864MBBK-T, RoHS=TRUE
XTAL1: "24MHz Â±100ppm Crystal 6pF 150 Ohms 4-SMD, No Lead", Package="SMD-4 Murata", Digi-Key_Part_Number=490-5575-1-ND, Digi-Key_Purchase_URL=https://www.digikey.com/product-detail/en/murata-electronics/XRCGB24M000F0L00R0/490-5575-1-ND/2368389?utm_source=snapeda&utm_medium=aggregator&utm_campaign=symbol, MF=Murata, MP=XRCGB24M000F0L00R0, SnapEDA_Link=https://www.snapeda.com/parts/XRCGB24M000F0L00R0/Murata%20Electronics%20North%20America/view-part/329553/?ref=snap

## Via types
v1: diameter 0.45, hole 0.2, Top Layer to Bottom Layer, 18 vias
v2: diameter 0.5, hole 0.2, Top Layer to Bottom Layer, 1 vias
v3: diameter 1.27, hole 0.711, Top Layer to Bottom Layer, 1 vias

## Nets (pads, with @x,y where several pads share a name; then routed paths per layer and width w, separated by ;. In a path a pad name is that pad's centre, name@x,y a point inside that pad or via, vN(x,y) a via of type N, cw(c..) or ccw(c..) an arc to the next point about the centre after c; other vN are vias at no path point)
+3.3V: C14.1 U8.5 U9.5 U9.10 U9.15 U9.23 U9.26 U9.27 U9.29 U9.36 | length 56.2
  Top Layer w0.254: U8.5@40.416,106.233 42.082,106.233 C14.1@42.418,105.897 ; U9.29 49.188,107.677 48.718,107.677 48.387,108.008 48.387,109.814 47.73,110.471 47.73,111.484 48.26,112.014 52.076,112.014 52.591,111.499 52.591,110.272 52.4,110.081 52.229,110.081 52.01,109.861 v1(51.957,109.861) 51.948,109.852 51.948,108.927 U9.23 ; U9.27 U9.26 ; v1(51.603,99.281) 51.603,99.334 51.943,99.674 U9.5 U9.5@51.948,103.427 ; U9.10 54.698,104.177 55.168,104.177 55.626,104.635 55.626,106.209 ; U9.15 54.698,106.667 55.168,106.667 55.626,106.209 ; v1(54.991,111.252) 54.991,111.125 55.626,110.49 55.626,106.209
  Bottom Layer w0.254: v1(42.926,106.553) 42.926,105.283 44.196,104.013 v1(49.149,104.013) ; 49.943,108.922 49.943,107.696 ; v1(51.603,99.281) 50.198,99.281 48.641,100.838 48.641,103.505 v1(49.149,104.013) ; v1@51.943,109.855 51.562,109.474 51.562,109.315 49.943,107.696 ; v1(51.957,109.861) 53.348,111.252 v1(54.991,111.252) ; v1(49.149,104.013) 49.187,104.051 49.695,104.051 49.943,104.299 49.943,107.696
+5: C13.1 C15.1 C16.1 C17.1 J2.1 J3.1 J4.1 P14.1 P15.1 U8.1 U8.3 | length 110
  Top Layer w0.254: C17.1 27.151,103.272 C13.1 ; U8.3 36.681,104.333 36.312,103.964 36.312,103.797 35.786,103.272 C13.1 ; U8.1 37.765,106.03 38.115,106.03 38.389,105.756 38.389,104.818 38.1,104.529 38.1,100.584 42.126,96.558 48.603,96.558 P14.1 50.8,94.361 60.198,94.361 P15.1 ; J3.1 78.176,117.838 77.319,118.695 77.319,118.769 77.089,118.999 70.104,118.999 69.342,118.237 69.342,117.729 69.076,117.463 J4.1 56.803,117.838 56.305,118.336 55.781,118.336 52.705,121.412 38.806,121.412 32.358,114.964 J2.1 32.358,108.866 34.354,106.87 34.354,105.236 34.819,104.771 35.095,104.771 35.56,104.305 C13.1
AREF: C12.2 U7.42
D+: D1.1 J2.3 U9.31 | length 21.2
  Top Layer w0.254: D1.1 J2.3 36.098,112.172 36.321,112.395 v1(36.703,112.395) ; v1(47.117,106.807) 47.9,106.807 48.035,106.672 U9.31
  Bottom Layer w0.254: v1(36.703,112.395) 37.084,112.776 44.45,112.776 46.101,111.125 46.101,107.823 v1(47.117,106.807)
D+Deej: J1.3 P4.3 U7.4
D-: D2.1 J2.2 U9.30 | length 23.9
  Top Layer w0.254: D2.1@34.798,108.624 34.798,108.675 34.848,108.725 J2.2 34.848,112.826 35.306,113.284 44.958,113.284 45.974,112.268 45.974,107.823 46.315,107.482 47.868,107.482 48.177,107.172 U9.30
D-Deej: J1.2 P4.2 U7.3
GND: C1.1 C2.1 C3.1 C4.1 C5.1 C6.1 C7.1 C8.1 C9.2 C10.1 C11.1 C12.1 C13.2 C14.2 C15.2 C16.2 C17.2 C18.2 C19.2 D1.2 D2.2 D3.1 D4.1 D5.1 D6.1 D7.1 D8.1 D9.1 D10.1 J1.5 J1.Shell J2.4 J2.5 J2.6 J3.4 J3.Shell J4.4 J4.Shell P1.3 P2.3 P3.3 P4.4 P9.3 P14.4 P15.4 R1.3 R1.4 R1.5 R3.3 R3.4 R3.5 R4.3 R4.4 R4.5 R5.3 R5.4 R5.5 R6.3 R6.4 R6.5 R7.3 R7.4 R7.5 R9.1 R10.1 R11.2 Reset1.1 SW1.1 SW2.1 SW3.1 SW4.1 SW5.1 SW6.1 U1.3 U3.3 U4.3 U6.3 U7.5 U7.15 U7.23 U7.35 U7.43 U8.2 U9.22 U9.24 U9.37 | length 13.8
  Top Layer w0.254: C13.2 35.786,106.024 36.528,105.283 U8.2 ; P1.3 43.586,30.591 46.126,33.131 U1.3 ; U9.24@51.448,108.917 U9.24 51.443,106.672 v2(51.943,106.172) 52.443,106.672 U9.22 U9.22@52.438,108.917
  other v1: 42.164,109.982
  other v3: 46.609,113.792
LEDIN: P9.2 U7.27
M1: P11.1 U7.20
M2: P11.2 U7.21
M3: P11.3 U7.19
M4: P13.1 U7.18
M5: P13.2 U7.25
M6: P13.3 U7.31
NetD3_2: D3.2 J3.2 U9.1 | length 38.9
  Top Layer w0.254: D3.2 48.768,101.756 49.285,102.273 49.285,102.454 49.943,103.112 U9.1 ; v1(59.323,103.13) 59.323,104.513 60.325,105.515 60.474,105.664 64.252,105.664 75.676,117.088 J3.2
  Bottom Layer w0.254: v1(49.247,102.235) 49.276,102.206 49.276,101.346 50.63,99.992 56.185,99.992 v1(59.323,103.13)
NetD4_2: D4.2 J3.3 U9.2 | length 35.7
  Top Layer w0.254: D4.2 49.657,101.731 49.913,101.987 49.913,102.225 v1(49.95,102.262) 49.95,102.315 50.177,102.542 50.177,102.642 50.438,102.903 50.438,103.417 U9.2 ; v1(59.578,106.299) 62.887,106.299 73.676,117.088 J3.3
  Bottom Layer w0.254: v1(49.95,102.262) 49.982,102.231 49.982,101.656 51.192,100.446 55.488,100.446 59.578,104.536 v1(59.578,106.299)
NetD5_2: D5.2 J4.2 U9.3 | length 22.5
  Top Layer w0.254: D5.2@50.548,101.223 50.907,101.582 50.907,101.793 v1@50.632,102.068 ; v1(50.593,101.975) 50.631,102.012 50.631,102.454 50.938,102.761 50.938,103.417 U9.3 ; J4.2 54.303,110.67 54.864,110.109 v1(54.864,109.855)
  Bottom Layer w0.254: v1(50.593,101.975) 51.668,100.9 51.878,100.9 54.864,103.886 v1(54.864,109.855)
NetD6_2: D6.2 J4.3 U9.4 | length 19.8
  Top Layer w0.254: D6.2@51.435,101.223 51.435,102.069 51.315,102.189 51.315,102.295 51.443,102.423 U9.4 ; J4.3 52.303,114.44 53.045,113.697 53.045,110.299 53.235,110.109 v1(53.975,110.109)
  Bottom Layer w0.254: v1(51.315,102.242) 53.975,104.902 v1(53.975,110.109)
NetD7_2: D7.2 P14.2 U9.6 | length 9.3
  Top Layer w0.254: P14.2 P14.2@51.816,96.249 ; D7.2 P14.2@51.816,96.249 ; U9.6 52.443,96.876 P14.2@51.816,96.249
NetD8_2: D8.2 P14.3 U9.7 | length 10
  Top Layer w0.254: U9.7 52.943,97.679 52.959,97.663 52.959,97.282 P14.3 D8.2
NetD9_2: D9.2 P15.2 U9.8 | length 11.9
  Top Layer w0.254: U9.8 53.443,100.989 55.753,98.679 59.182,98.679 P15.2
NetD10_2: D10.2 P15.3 U9.9 | length 9.8
  Top Layer w0.254: U9.9 53.943,101.886 54.61,101.219 59.182,101.219 P15.3
NetP1_2: P1.2 U1.4 | length 5.8
  Top Layer w0.254: P1.2 46.374,29.204 46.374,30.079 49.426,33.131 U1.4
NetP2_2: P2.2 U3.2
NetP3_2: P3.2 U4.4
NetP5_1: P5.1 R1.2 | length 13.8
  Top Layer w0.254: P5.1 37.846,84.328 37.846,75.692 39.547,73.991 R1.2
NetP5_2: P5.2 R3.2 | length 34
  Top Layer w0.254: P5.2 37.084,82.55 37.084,57.277 39.41,54.951 R3.2
NetP5_3: P5.3 R4.2 | length 54.8
  Top Layer w0.254: P5.3 36.195,80.899 36.195,37.846 38.1,35.941 R4.2 R4.2@39.01,36.189
NetP6_1: P6.1 SW1.2
NetP6_2: P6.2 SW2.2
NetP6_3: P6.3 SW3.2
NetP7_1: P7.1 U7.41
NetP7_2: P7.2 U7.40
NetP7_3: P7.3 U7.39
NetP8_1: P8.1 U7.38
NetP8_2: P8.2 U7.37
NetP8_3: P8.3 U7.36
NetP10_1: P10.1 SW4.2
NetP10_2: P10.2 SW5.2
NetP10_3: P10.3 SW6.2
NetP12_1: P12.1 R5.2
NetP12_2: P12.2 R6.2
NetP12_3: P12.3 R7.2
NetR9_2: R9.2 U9.25 | length 2.2
  Top Layer w0.254: U9.25 50.948,108.927 50.948,109.876 51.248,110.176 51.248,110.698 R9.2
NetR10_2: R10.2 U9.28 | length 2.8
  Top Layer w0.254: R10.2 49.149,108.184 49.161,108.172 U9.28
NetR11_1: R11.1 U9.35 | length 4.8
  Top Layer w0.254: R11.1 47.272,101.24 48.26,102.228 48.26,104.267 48.66,104.667 49.188,104.667 U9.35
NetU1_2: U1.2 U2.4
NetU2_2: U2.2 U3.4
NetU4_2: U4.2 U5.4
NetU5_2: U5.2 U6.4
RESET: R2.2 Reset1.2 U7.13
UCAP: C9.1 U7.6
VCC: C1.2 C2.2 C3.2 C4.2 C5.2 C6.2 C7.2 C8.2 J1.1 P1.1 P2.1 P3.1 P4.1 P9.1 R1.1 R2.1 R3.1 R4.1 R5.1 R6.1 R7.1 U1.1 U2.1 U3.1 U4.1 U5.1 U6.1 U7.2 U7.7 U7.14 U7.24 U7.34 U7.44
XTAL1: C11.2 U7.17 X1.2
XTAL2: C10.2 U7.16 X1.1
XTALIN: C19.1 R8.2 U9.33 XTAL1.3 | length 7.8
  Top Layer w0.254: XTAL1.3 44.72,105.187 44.883,105.187 45.422,104.648 46.132,104.648 46.626,104.154 46.777,104.154 47.402,103.529 47.752,103.879 v1(47.752,105.156) 48.268,105.672 U9.33
  Bottom Layer w0.254: v1(47.752,105.156) 47.78,105.128 R8.2
XTALOUT: C18.1 R8.1 U9.32 XTAL1.1 | length 8.3
  Top Layer w0.254: C18.1@44.769,108.815 C18.1@44.769,108.966 ; C18.1@44.8,108.712 45.425,108.087 45.425,107.03 45.902,106.553 45.927,106.553 46.128,106.352 46.683,106.352 46.863,106.172 v1(47.625,106.172) U9.32
  Bottom Layer w0.254: v1(47.625,106.172) 48.387,106.934 R8.1
pads on no net: J1.4 J2.MH J3.MH1 J3.MH2 J4.MH1 J4.MH2 SW1.MH1 SW1.MH2 SW1.MH3 SW2.MH1 SW2.MH2 SW2.MH3 SW3.MH1 SW3.MH2 SW3.MH3 SW4.MH1 SW4.MH2 SW4.MH3 SW5.MH1 SW5.MH2 SW5.MH3 SW6.MH1 SW6.MH2 SW6.MH3 U2.3 U5.3 U6.2 U7.1 U7.8 U7.9 U7.10 U7.11 U7.12 U7.22 U7.26 U7.28 U7.29 U7.30 U7.32 U7.33 U8.4 U9.11 U9.12 U9.13 U9.14 U9.16 U9.17 U9.18 U9.19 U9.20 U9.21 U9.34 XTAL1.2 XTAL1.4

## Polygon pours and split planes (outlines as drawn)
GND on Top Layer "NONET_L01_P000" (solid, shelved, pour order 0): 25.4,127 84.963,127 84.963,117.348 82.804,115.189 75.946,115.189 65.151,104.394 65.151,91.821 25.4,91.821

## Silkscreen, mask and mechanical layers (free items; w line width, h text height)
Top Assembly:
  lines w0.254: 24.769,125.475 25.273,127 ; 25.015,28.447 25.527,26.924 ; 25.019,126.999 25.527,127.001 ; 25.273,26.923 25.781,26.925 ; 25.378,85.621 25.273,127 ; 25.422,68.303 25.527,26.924 ; 25.785,125.477 25.273,127 ; 26.031,28.449 25.527,26.924
  text "100.076 (mm)" at 24.465,85.364 h1.52 r270.15

## Dimensions
25.273,127 to 125.476,127.127 on Top Assembly

## Text inside footprints (layer, text, board x,y; h text height)
J1: Top 3D Body "PCB Edge" at 275.299,153.84 h0.41 r90
J2: Mechanical 1 "Board Edge" at 37.276,127.946 h0.5 r180
J3: Top 3D Body "PCB Edge" at 76.676,126.663 h0.61 r180
J4: Top 3D Body "PCB Edge" at 55.303,126.663 h0.61 r180